# Allegro board 80DB_LIDAR_1.brd
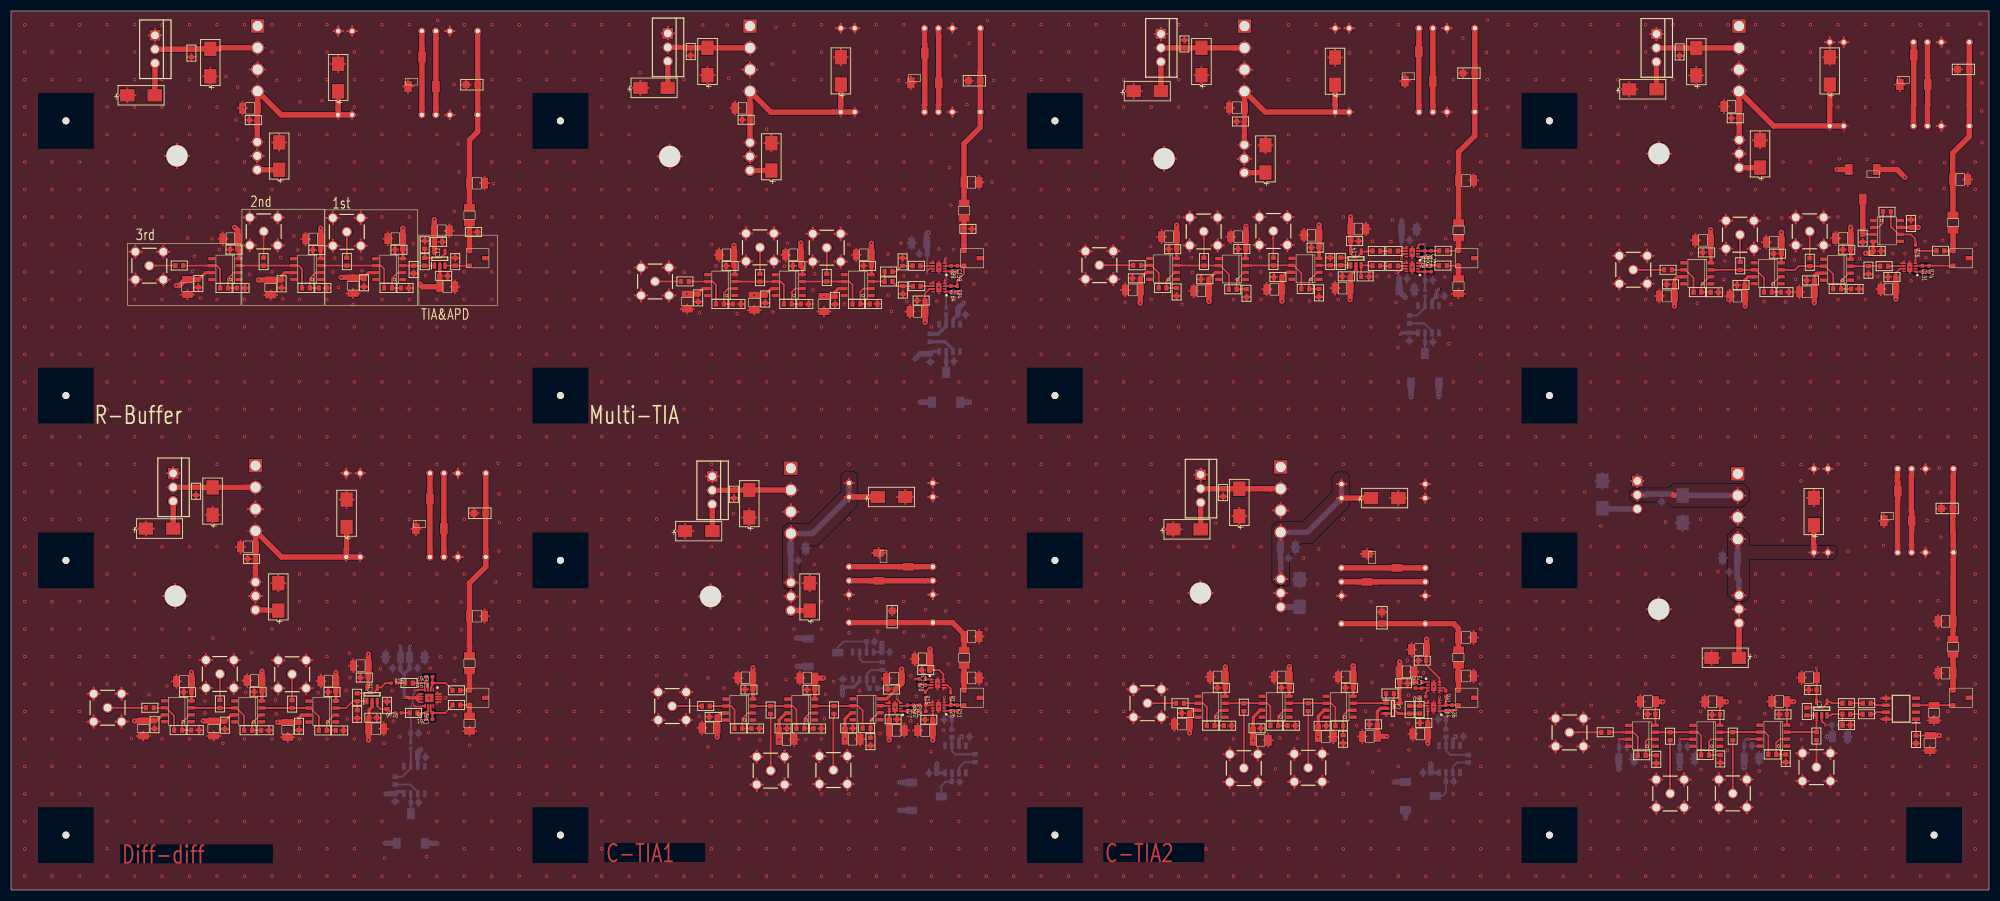
[diagram p0: board, top side]
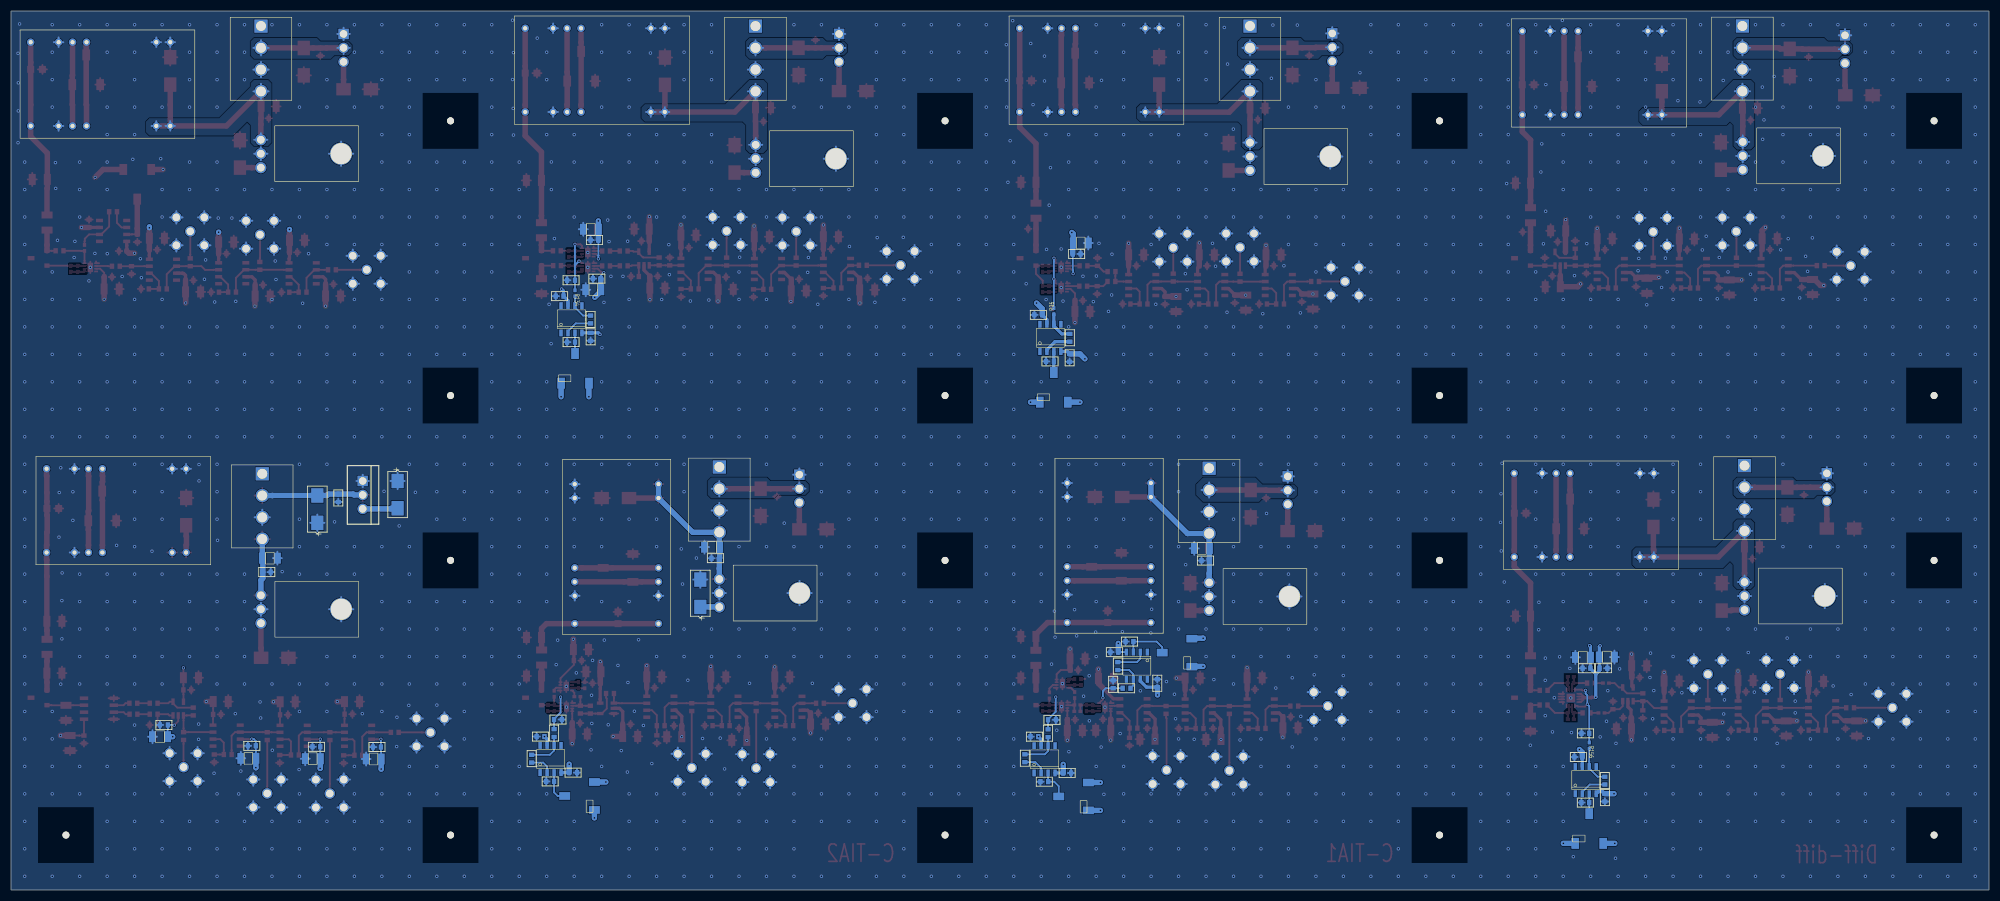
[diagram p1: board, bottom side, seen from below]

Outline 360 x 160 mm; copper layers: TOP, GND, PWD, BOTTOM. Coordinates in mm from the lower left corner of the outline.
Outline path: rectangle 0,0 360,160

## Design rules (mm)
constraint set DEFAULT: min track width 0.127

## Placement (name value [footprint] x y rotation side)
C1  6.8uF_3216  [SMC321612]  143.27 62.18 0 bottom
C2  0.47uF_1608  [SMC1608]  141.9 59.96 0 bottom
C3  10uF_6032  [SMC603212]  145.36 50.86 90 top
C4  47uF_6032  [SMC603212]  157.76 71.54 0 top
C5  4.7nF_2012_250V  [SMC2012]  160.38 48.68 90 top
C6  10uF_6032  [SMC603212]  134.37 67.82 90 top
C7  0.47uF_1608  [SMC1608]  131.56 71.33 90 top
C8  10uF_6032  [SMC603212]  122.68 65.33 0 top
C9  0.1u_1608  [SMC1608]  153.2 29.43 180 top
C10  6.8u_3216  [SMC321612]  153.16 27.45 0 top
C11  0.1u_1608  [SMC1608]  141.23 29.39 180 top
C12  6.8u_3216  [SMC321612]  141.15 27.4 0 top
C13  0.1u_1608  [SMC1608]  127.09 31.52 0 top
C14  6.8u_3216  [SMC321612]  127.14 29.51 180 top
C15  0.1u_1608  [SMC1608]  159.55 36.49 0 top
C16  6.8u_3216  [SMC321612]  160.71 38.51 180 top
C17  0.1u_1608  [SMC1608]  144.89 36.44 0 top
C18  6.8u_3216  [SMC321612]  144.94 38.58 180 top
C19  0.1u_1608  [SMC1608]  133.6 36.5 0 top
C20  6.8u_3216  [SMC321612]  133.66 38.62 180 top
C21  0.1u_1608  [SMC1608]  166.33 31.01 0 top
C22  6.8u_3216  [SMC321612]  166.38 29.03 180 top
C23  0.1u_1608  [SMC1608]  161.26 31.06 180 top
C24  6.8u_3216  [SMC321612]  161.21 29.07 0 top
C25  1n_3216  [SMC321612]  174.84 38.6 180 top
C26  0.2p_1005  [SMR1005]  171.01 33.08 270 top
C27  4p_1005  [SMR1005]  163.12 33.08 270 top
C28  1n_1005  [SMR1005]  165.92 33.68 180 top
C29  1n_3216  [SMC321612]  174.84 46.15 180 top
C30  0.1u_1608  [SMC1608]  151.37 38.35 270 bottom
C31  0.1u_1608  [SMC1608]  174.45 27.92 180 bottom
C32  0.1u_1608  [SMC1608]  159.41 36.73 90 bottom
C33  0.1u_1608  [SMC1608]  171.25 30.98 180 bottom
C34  100n_1005  [SMR1005]  166.43 37.88 90 top
C35  0.1u_1608  [SMC1608]  157.15 45.22 180 bottom
C36  0.1u_1608  [SMC1608]  172.65 19.72 180 bottom
C37  0.1u_1608  [SMC1608]  159.9 43.3 180 bottom
C38  0.1u_1608  [SMC1608]  165.78 40.04 0 top
C39  6.8u_3216  [SMC321612]  165.89 42.08 180 top
C40  0.1u_1608  [SMC1608]  167.07 21.3 0 bottom
C41  6.8uF_3216  [SMC321612]  232.4 62.41 0 bottom
C42  0.47uF_1608  [SMC1608]  231.09 60.39 0 bottom
C43  10uF_6032  [SMC603212]  234.54 51.53 90 bottom
C44  47uF_6032  [SMC603212]  247.52 71.34 0 top
C45  4.7nF_2012_250V  [SMC2012]  249.52 48.48 90 top
C46  10uF_6032  [SMC603212]  223.56 68.07 90 top
C47  0.47uF_1608  [SMC1608]  220.6 71.62 90 top
C48  10uF_6032  [SMC603212]  211.54 65.65 0 top
C49  0.1u_1608  [SMC1608]  239.34 29.89 180 top
C50  6.8u_3216  [SMC321612]  239.29 27.9 0 top
C51  0.1u_1608  [SMC1608]  227.49 29.42 180 top
C52  6.8u_3216  [SMC321612]  227.45 27.24 0 top
C53  0.1u_1608  [SMC1608]  213.08 32.2 0 top
C54  6.8u_3216  [SMC321612]  213.11 30.21 180 top
C55  0.1u_1608  [SMC1608]  242.87 36.82 0 top
C56  6.8u_3216  [SMC321612]  242.92 38.79 180 top
C57  0.1u_1608  [SMC1608]  231.22 36.81 0 top
C58  6.8u_3216  [SMC321612]  231.27 38.78 180 top
C59  0.1u_1608  [SMC1608]  219.56 36.81 0 top
C60  6.8u_3216  [SMC321612]  219.62 38.78 180 top
C61  0.1u_1608  [SMC1608]  256.43 30.4 0 top
C62  6.8u_3216  [SMC321612]  256.49 28.4 180 top
C63  1n_3216  [SMC321612]  264.81 38.95 180 top
C64  0.2p_1005  [SMR1005]  261.12 33.11 270 top
C65  1n_1608  [SMC1608]  256.37 33.55 270 top
C66  1n_3216  [SMC321612]  264.81 45.97 180 top
C67  10u_3216  [SMC321612]  247.31 27.95 180 top
C68  0.1u_1608  [SMC1608]  247.24 30.16 0 top
C69  10u_3216  [SMC321612]  253.99 39.72 0 top
C70  0.1u_1608  [SMC1608]  254.16 37.62 180 top
C71  0.1u_1608  [SMC1608]  264.33 27.93 180 bottom
C72  0.1u_1608  [SMC1608]  261.16 31.03 180 bottom
C73  100n_1005  [SMR1005]  256.73 37.27 90 top
C74  0.1u_1608  [SMC1608]  262.58 19.77 180 bottom
C75  0.1u_1608  [SMC1608]  256.99 21.36 0 bottom
C76  0.1u_1608  [SMC1608]  256.13 41.76 0 top
C77  6.8u_3216  [SMC321612]  256.27 43.77 180 top
C78  6.8uF_3216  [SMC321612]  312.89 60.41 180 bottom
C79  0.47uF_1608  [SMC1608]  314.16 57.87 180 bottom
C80  10uF_6032  [SMC603212]  314.48 42.27 180 top
C81  47uF_6032  [SMC603212]  328.12 66.39 90 top
C82  4.7nF_2012_250V  [SMC2012]  353.46 69.45 180 top
C83  10uF_6032  [SMC603212]  304.25 66.83 90 bottom
C84  0.47uF_1608  [SMC1608]  300.44 70.64 90 bottom
C85  10uF_6032  [SMC603212]  289.64 74.45 270 bottom
C86  0.1u_1608  [SMC1608]  316.88 26.25 180 bottom
C87  6.8u_3216  [SMC321612]  316.8 23.98 0 bottom
C88  0.1u_1608  [SMC1608]  305.12 26.08 180 bottom
C89  6.8u_3216  [SMC321612]  305.07 23.9 0 bottom
C90  0.1u_1608  [SMC1608]  294.1 26.02 180 bottom
C91  6.8u_3216  [SMC321612]  294 23.85 0 bottom
C92  0.1u_1608  [SMC1608]  321.79 31.96 0 top
C93  6.8u_3216  [SMC321612]  321.83 34.3 180 top
C94  0.1u_1608  [SMC1608]  309.6 31.89 0 top
C95  6.8u_3216  [SMC321612]  309.64 34.26 180 top
C96  0.1u_1608  [SMC1608]  297.86 32 0 top
C97  6.8u_3216  [SMC321612]  297.93 34.29 180 top
C98  100n_1608  [SMC1608]  327.2 36.42 0 top
C99  10u_3216  [SMC321612]  327.25 38.64 180 top
C100  100n_1608  [SMC1608]  332.88 30.05 180 bottom
C101  10u_3216  [SMC321612]  332.87 27.9 0 bottom
C102  10n_1608  [SMC1608]  346.72 26.69 90 top
C103  6.8u_3216  [SMC321612]  349.25 26.75 270 top
C104  1n_3216  [SMC321612]  352.1 39.48 0 top
C105  0.1u_1608  [SMC1608]  337 32 0 top
C106  0.1u_1608  [SMC1608]  338.45 34 180 top
C107  1n_3216  [SMC321612]  352.1 48.91 0 top
C108  6.8uF_3216  [SMC321612]  313.12 142.63 180 top
C109  0.47uF_1608  [SMC1608]  314.52 140.47 180 top
C110  10uF_6032  [SMC603212]  318.33 131.49 90 top
C111  47uF_6032  [SMC603212]  331.02 146.6 90 top
C112  4.7nF_2012_250V  [SMC2012]  356.41 149.37 180 top
C113  10uF_6032  [SMC603212]  306.71 148.28 90 top
C114  0.47uF_1608  [SMC1608]  303.69 151.84 90 top
C115  10uF_6032  [SMC603212]  294.5 145.75 0 top
C116  0.1u_1608  [SMC1608]  326.81 110.97 0 top
C117  6.8u_3216  [SMC321612]  326.86 108.87 180 top
C118  0.1u_1608  [SMC1608]  314.14 110.13 0 top
C119  6.8u_3216  [SMC321612]  314.19 108.1 180 top
C120  0.1u_1608  [SMC1608]  301.31 110.25 0 top
C121  6.8u_3216  [SMC321612]  301.38 108.12 180 top
C122  0.1u_1608  [SMC1608]  333.39 116.55 0 top
C123  6.8u_3216  [SMC321612]  333.44 118.64 180 top
C124  0.1u_1608  [SMC1608]  320.79 115.83 0 top
C125  6.8u_3216  [SMC321612]  320.83 117.93 180 top
C126  0.1u_1608  [SMC1608]  307.89 116.06 0 top
C127  6.8u_3216  [SMC321612]  307.94 118.27 180 top
C128  1n_3216  [SMC321612]  354.76 129.34 180 top
C129  0.1u_1608  [SMC1608]  341.62 111.58 0 top
C130  6.8u_3216  [SMC321612]  341.68 109.39 180 top
C131  4p_1005  [SMR1005]  347.86 113.09 270 top
C132  1n_1608  [SMC1608]  351.87 116.35 180 top
C133  1n_1608  [SMC1608]  341.62 113.54 180 top
C134  0.1u_1608  [SMC1608]  345.79 122.03 270 top
C135  0.1u_1608  [SMC1608]  337 117.93 90 top
C136  0.1u_1608  [SMC1608]  340.35 116.31 180 top
C137  6.8uF_3216  [SMC321612]  133.13 142.32 180 top
C138  0.47uF_1608  [SMC1608]  134.5 140.2 180 top
C139  10uF_6032  [SMC603212]  138.39 130.97 90 top
C140  47uF_6032  [SMC603212]  151.04 146.61 90 top
C141  4.7nF_2012_250V  [SMC2012]  176.4 147.3 180 top
C142  10uF_6032  [SMC603212]  126.77 148.32 90 top
C143  0.47uF_1608  [SMC1608]  123.71 151.89 90 top
C144  10uF_6032  [SMC603212]  114.55 146.01 0 top
C145  0.1u_1608  [SMC1608]  149.97 106.61 90 top
C146  6.8u_3216  [SMC321612]  147.97 106.67 270 top
C147  0.1u_1608  [SMC1608]  137.26 106.86 90 top
C148  6.8u_3216  [SMC321612]  135.26 106.92 270 top
C149  0.1u_1608  [SMC1608]  125.06 107.06 90 top
C150  6.8u_3216  [SMC321612]  123.06 107.11 270 top
C151  0.1u_1608  [SMC1608]  155.16 113.61 0 top
C152  6.8u_3216  [SMC321612]  155.22 115.61 180 top
C153  0.1u_1608  [SMC1608]  142.31 113.61 0 top
C154  6.8u_3216  [SMC321612]  142.37 115.61 180 top
C155  0.1u_1608  [SMC1608]  130.16 113.61 0 top
C156  6.8u_3216  [SMC321612]  130.22 115.61 180 top
C157  0.1u_1608  [SMC1608]  165.33 115.78 0 bottom
C158  6.8u_3216  [SMC321612]  165.3 117.77 180 bottom
C159  4p_1005  [SMR1005]  172.25 113.1 270 top
C160  1n_1608  [SMC1608]  165.51 113.61 180 top
C161  1n_3216  [SMC321612]  174.82 128.82 180 top
C162  0.1u_1608  [SMC1608]  164.93 107.3 0 top
C163  6.8u_3216  [SMC321612]  164.99 105.31 180 top
C164  4p_1005  [SMR1005]  171.08 109.38 270 top
C165  1n_1608  [SMC1608]  173.45 120.35 0 top
C166  1n_1608  [SMC1608]  165.56 109.92 180 top
C167  0.1u_1608  [SMC1608]  173.74 104.7 180 bottom
C168  0.1u_1608  [SMC1608]  171.61 96.22 180 bottom
C169  0.1u_1608  [SMC1608]  167.33 96.16 90 bottom
C170  6.8uF_3216  [SMC321612]  43.51 142.3 180 top
C171  0.47uF_1608  [SMC1608]  44.81 140.13 180 top
C172  10uF_6032  [SMC603212]  48.81 131.1 90 top
C173  47uF_6032  [SMC603212]  59.54 145.39 90 top
C174  4.7nF_2012_250V  [SMC2012]  84.95 146.57 180 top
C175  10uF_6032  [SMC603212]  36.27 148.12 90 top
C176  0.47uF_1608  [SMC1608]  32.83 151.62 90 top
C177  10uF_6032  [SMC603212]  21.18 144.66 0 top
C178  0.1u_1608  [SMC1608]  64.25 109.81 90 top
C179  6.8u_3216  [SMC321612]  62.27 109.97 270 top
C180  0.1u_1608  [SMC1608]  49.24 109.62 90 top
C181  6.8u_3216  [SMC321612]  47.27 109.67 270 top
C182  0.1u_1608  [SMC1608]  34.09 109.7 90 top
C183  6.8u_3216  [SMC321612]  32.12 109.75 270 top
C184  0.1u_1608  [SMC1608]  69.89 116.55 0 top
C185  6.8u_3216  [SMC321612]  69.94 118.55 180 top
C186  0.1u_1608  [SMC1608]  54.94 116.5 0 top
C187  6.8u_3216  [SMC321612]  55 118.5 180 top
C188  0.1u_1608  [SMC1608]  39.87 116.58 0 top
C189  6.8u_3216  [SMC321612]  39.92 118.55 180 top
C190  0.1u_1608  [SMC1608]  78.51 117.98 180 top
C191  6.8u_3216  [SMC321612]  78.41 119.99 0 top
C192  1n_3216  [SMC321612]  84.81 128.67 180 top
C193  1n_1608  [SMC1608]  83.45 119.78 0 top
C194  0.1u_1608  [SMC1608]  79.46 111.79 180 top
C195  6.8u_3216  [SMC321612]  79.4 109.81 0 top
C196  6.8uF_3216  [SMC321612]  223.13 142.39 180 top
C197  0.47uF_1608  [SMC1608]  224.48 139.88 180 top
C198  10uF_6032  [SMC603212]  228.31 130.59 90 top
C199  47uF_6032  [SMC603212]  240.98 146.55 90 top
C200  4.7nF_2012_250V  [SMC2012]  266.41 148.69 180 top
C201  10uF_6032  [SMC603212]  216.66 148.32 90 top
C202  0.47uF_1608  [SMC1608]  213.58 154.71 270 top
C203  10uF_6032  [SMC603212]  204.32 145.42 0 top
C204  0.1u_1608  [SMC1608]  229.87 111.57 0 top
C205  6.8u_3216  [SMC321612]  229.92 109.34 180 top
C206  0.1u_1608  [SMC1608]  216.57 111.17 0 top
C207  6.8u_3216  [SMC321612]  216.63 109.06 180 top
C208  0.1u_1608  [SMC1608]  204.11 111.34 0 top
C209  6.8u_3216  [SMC321612]  204.17 109.23 180 top
C210  0.1u_1608  [SMC1608]  236.65 116.94 0 top
C211  6.8u_3216  [SMC321612]  236.69 119.19 180 top
C212  0.1u_1608  [SMC1608]  223.3 116.69 0 top
C213  6.8u_3216  [SMC321612]  223.35 118.91 180 top
C214  0.1u_1608  [SMC1608]  210.72 116.66 0 top
C215  6.8u_3216  [SMC321612]  210.78 118.91 180 top
C216  1n_3216  [SMC321612]  264.83 129.16 180 top
C217  0.1u_1608  [SMC1608]  254.51 118.3 180 bottom
C218  6.8u_3216  [SMC321612]  254.47 120.28 0 bottom
C219  0.1u_1608  [SMC1608]  245.26 118.12 180 top
C220  6.8u_3216  [SMC321612]  245.22 120.31 0 top
C221  4p_1005  [SMR1005]  258.48 115.8 270 top
C222  1n_1608  [SMC1608]  261.36 116.35 180 top
C223  1n_1608  [SMC1608]  252.41 116.31 180 top
C224  0.1u_1608  [SMC1608]  254.08 111.28 180 bottom
C225  6.8u_3216  [SMC321612]  254.02 109.26 0 bottom
C226  4p_1005  [SMR1005]  258.47 113.1 90 top
C227  1n_1608  [SMC1608]  261.32 113.65 180 top
C228  1n_1608  [SMC1608]  252.41 113.6 180 top
C229  1n_1608  [SMC1608]  258.78 110.99 180 bottom
C230  0.1u_1608  [SMC1608]  242.31 111.7 0 top
C231  6.8u_3216  [SMC321612]  242.36 109.56 180 top
C232  0.1u_1608  [SMC1608]  260.86 108.1 180 bottom
C233  0.1u_1608  [SMC1608]  258.78 99.73 180 bottom
C234  0.1u_1608  [SMC1608]  254.51 99.98 90 bottom
C235  6.8uF_3216  [SMC321612]  43.15 62.46 180 top
C236  0.47uF_1608  [SMC1608]  44.49 60.27 180 top
C237  10uF_6032  [SMC603212]  48.65 50.86 90 top
C238  47uF_6032  [SMC603212]  61.08 66.09 90 top
C239  4.7nF_2012_250V  [SMC2012]  86.4 68.59 180 top
C240  10uF_6032  [SMC603212]  36.69 68.3 90 top
C241  0.47uF_1608  [SMC1608]  33.67 71.88 90 top
C242  10uF_6032  [SMC603212]  24.54 65.79 0 top
C243  0.1u_1608  [SMC1608]  52.41 29.1 90 top
C244  6.8u_3216  [SMC321612]  50.37 29.16 270 top
C245  0.1u_1608  [SMC1608]  38.91 29.28 90 top
C246  6.8u_3216  [SMC321612]  36.9 29.41 270 top
C247  0.1u_1608  [SMC1608]  26.12 29.37 90 top
C248  6.8u_3216  [SMC321612]  24.08 29.41 270 top
C249  0.1u_1608  [SMC1608]  57.71 36.04 0 top
C250  6.8u_3216  [SMC321612]  57.77 38.03 180 top
C251  0.1u_1608  [SMC1608]  44.25 36.09 0 top
C252  6.8u_3216  [SMC321612]  44.32 38.13 180 top
C253  0.1u_1608  [SMC1608]  31.43 36.01 0 top
C254  6.8u_3216  [SMC321612]  31.48 37.97 180 top
C255  6.8u_3216  [SMC321612]  69.55 42.4 180 bottom
C256  6.8u_3216  [SMC321612]  73.91 42.35 0 bottom
C257  0.1u_1608  [SMC1608]  69.46 40.36 0 bottom
C258  0.1u_1608  [SMC1608]  63.58 38.68 0 top
C259  6.8u_3216  [SMC321612]  63.67 40.82 180 top
C260  0.1u_1608  [SMC1608]  73.97 40.37 180 bottom
C261  4p_1005  [SMR1005]  76.15 31.08 180 top
C262  1n_3216  [SMC321612]  84.81 49.85 180 top
C263  1n_1608  [SMC1608]  73.97 32.24 180 top
C264  1n_1608  [SMC1608]  81.78 33.67 180 top
C265  1n_1608  [SMC1608]  81.77 36.34 180 top
C266  1n_1608  [SMC1608]  73.15 37.66 180 top
C267  4p_1005  [SMR1005]  76.16 38.84 180 top
C268  0.1u_1608  [SMC1608]  66.58 31.36 180 top
C269  6.8u_3216  [SMC321612]  66.45 29.34 0 top
C270  1n_1608  [SMC1608]  74.17 28.52 180 bottom
C271  0.1u_1608  [SMC1608]  75.45 24.22 180 bottom
C272  0.1u_1608  [SMC1608]  74.19 15.91 180 bottom
C273  0.1u_1608  [SMC1608]  69.92 16.11 90 bottom
IC1  OPA855IDSGR  [SON50P200X200X80-9N]  168.8 33.38 180 top
IC2  OPA855IDSGR  [SON50P200X200X80-9N]  160.9 33.28 180 top
IC3  OPA855IDSGR  [SON50P200X200X80-9N]  168.64 37.57 0 top
IC4  OPA855IDSGR  [SON50P200X200X80-9N]  258.91 33.3 180 top
IC5  OPA659IDBVT  [SOT95P280X145-5N]  251.52 33.07 0 top
IC6  OPA855IDSGR  [SON50P200X200X80-9N]  258.94 37.07 0 top
IC7  OPA659IDBVT  [SOT95P280X145-5N]  329.56 33.02 90 top
IC8  MAX3267CSA+  [SOIC127P600X175-8N]  344 33 180 top
IC9  OPA855IDSGR  [SON50P200X200X80-9N]  345.56 113.34 180 top
IC10  OPA855IDSGR  [SON50P200X200X80-9N]  168.87 113.36 180 top
IC11  OPA855IDSGR  [SON50P200X200X80-9N]  168.87 109.67 180 top
IC12  OPA659IDBVT  [SOT95P280X145-5N]  78.04 114.9 90 top
IC13  OPA855IDSGR  [SON50P200X200X80-9N]  255.02 116.05 180 top
IC14  OPA659IDBVT  [SOT95P280X145-5N]  244.79 114.95 90 top
IC15  OPA855IDSGR  [SON50P200X200X80-9N]  255.02 113.35 180 top
IC16  OPA659IDBVT  [SOT95P280X145-5N]  65.72 35.62 90 top
IC17  THS4509RGTT  [THS4509RGTT_PIN16_TEST_2_THS4509RGTT]  76.12 34.96 270 top
JP1  4 HEADER  [HEADER4]  141.94 70.83 180 bottom
JP2  4 HEADER  [HEADER4]  231.08 71.06 180 bottom
JP3  4 HEADER  [HEADER4]  314.27 69.82 180 bottom
JP4  4 HEADER  [HEADER4]  314.5 151.31 180 bottom
JP5  4 HEADER  [HEADER4]  134.5 151.31 180 bottom
JP6  4 HEADER  [HEADER4]  44.88 151.33 180 bottom
JP7  4 HEADER  [HEADER4]  224.5 151.31 180 bottom
JP8  4 HEADER  [HEADER4]  44.5 71.31 180 bottom
NOREF  -  [unnamed]  280 140 0 top
NOREF#2  -  [unnamed]  10 60 0 top
NOREF#3  -  [unnamed]  10 10 0 top
NOREF#4  -  [unnamed]  350 10 0 top
NOREF#5  -  [unnamed]  100 90 0 top
NOREF#6  -  [unnamed]  190 10 0 top
NOREF#7  -  [unnamed]  190 140 0 top
NOREF#8  -  [unnamed]  10 140 0 top
NOREF#9  -  [unnamed]  100 140 0 top
NOREF#10  -  [unnamed]  190 90 0 top
NOREF#11  -  [unnamed]  280 90 0 top
NOREF#12  -  [unnamed]  280 60 0 top
NOREF#13  -  [unnamed]  190 60 0 top
NOREF#14  -  [unnamed]  10 90 0 top
NOREF#15  -  [unnamed]  100 60 0 top
NOREF#16  -  [unnamed]  280 10 0 top
NOREF#17  -  [unnamed]  100 10 0 top
R1  5 kohm  [ST5EW]  157.92 61.37 0 top
R2  390_1608  [SMR1608]  155 29.46 0 top
R3  390_1608  [SMR1608]  142.96 29.4 0 top
R4  390_1608  [SMR1608]  131.68 29.41 0 top
R5  36_1608  [SMR1608]  156.43 27.71 270 top
R6  36_1608  [SMR1608]  146.06 29.4 0 top
R7  36_1608  [SMR1608]  134.77 29.41 0 top
R8  50_1608  [SMR1608]  149.78 33.49 270 top
R9  50_1608  [SMR1608]  138.25 33.48 270 top
R10  50_1608  [SMR1608]  127.16 33.48 180 top
R11  5M_1005  [SMR1005]  172.25 33.08 270 top
R12  1k_1005  [SMR1005]  164.27 33.08 270 top
R13  20k_3216  [SMR3216]  173.47 42.26 270 top
R14  200_1005  [SMR1005]  165.93 32.52 180 top
R16  80k_1005  [SMR1005]  166.41 35.49 270 top
R17  5M_1005  [SMR1005]  171.01 35.42 270 top
R18  200_1608  [SMR1608]  158.56 40.05 90 bottom
R19  200_1608  [SMR1608]  175.47 24.7 270 bottom
R20  80k_1005  [SMR1005]  165.27 37.88 270 top
R21  20 kohm  [ST5EW]  145.08 40.67 0 bottom
R22  10_1608  [SMC1608]  157.67 36.73 180 bottom
R23  20 kohm  [ST5EW]  163.91 14.49 0 bottom
R24  10_1608  [SMC1608]  171.25 29.25 270 bottom
R25  5 kohm  [ST5EW]  246.82 61.17 0 top
R26  390_1608  [SMR1608]  241.04 29.91 0 top
R27  390_1608  [SMR1608]  229.21 29.92 0 top
R28  390_1608  [SMR1608]  217.64 29.92 0 top
R29  36_1608  [SMR1608]  242.45 28.16 270 top
R30  36_1608  [SMR1608]  232.31 29.92 0 top
R31  36_1608  [SMR1608]  220.72 29.92 0 top
R32  50_1608  [SMR1608]  236.1 34 270 top
R33  50_1608  [SMR1608]  224.38 33.99 270 top
R34  50_1608  [SMR1608]  213.47 33.99 180 top
R35  200_1608  [SMC1608]  251.69 35.77 180 top
R36  5M_1005  [SMR1005]  262.29 33.11 270 top
R37  20k_3216  [SMR3216]  263.43 42.32 270 top
R38  200_1608  [SMR1608]  254.56 33.54 270 top
R40  80k_1005  [SMR1005]  256.92 35.19 180 top
R41  5M_1005  [SMR1005]  261.14 35.72 270 top
R42  200_1608  [SMR1608]  265.24 24.62 270 bottom
R43  20 kohm  [ST5EW]  253.82 14.58 0 bottom
R44  10_1608  [SMC1608]  261.16 29.28 270 bottom
R45  80k_1005  [SMR1005]  255.57 37.27 90 top
R46  5 kohm  [ST5EW]  340.86 67.22 90 top
R47  390_1608  [SMR1608]  319.85 24.67 0 top
R48  390_1608  [SMR1608]  307.62 24.58 0 top
R49  390_1608  [SMR1608]  296.07 24.53 0 top
R50  36_1608  [SMR1608]  323.01 24.66 270 top
R51  36_1608  [SMR1608]  311.09 24.57 270 top
R52  36_1608  [SMR1608]  299.45 24.51 270 top
R53  50_1608  [SMR1608]  313.36 28.72 270 top
R54  50_1608  [SMR1608]  301.96 28.71 270 top
R55  50_1608  [SMR1608]  290.86 28.7 180 top
R56  50_1608  [SMR1608]  328.59 28.74 270 top
R57  249_1608  [SMC1608]  326.83 31.78 90 top
R58  249_1608  [SMC1608]  334.75 32 180 top
R59  20k_3216  [SMR3216]  353.44 44.26 270 top
R60  249_1608  [SMC1608]  334.75 34 180 top
R61  249_1608  [SMC1608]  333.35 30.03 0 top
R62  NC_3216  [SMR3216]  350 32.25 270 top
R63  5 kohm  [ST5EW]  343.77 146.6 90 top
R64  390_1608  [SMR1608]  331.65 109.41 0 top
R65  390_1608  [SMR1608]  319.06 108.83 0 top
R66  390_1608  [SMR1608]  306.21 108.82 0 top
R67  36_1608  [SMR1608]  334.9 109.41 0 top
R68  36_1608  [SMR1608]  322.14 108.82 0 top
R69  36_1608  [SMR1608]  309.35 108.8 0 top
R70  50_1608  [SMR1608]  327.38 113.55 90 top
R71  50_1608  [SMR1608]  314.71 112.9 90 top
R72  50_1608  [SMR1608]  302.3 112.89 180 top
R73  20k_3216  [SMR3216]  353.44 121.49 270 top
R74  1k_1005  [SMR1005]  349.12 113.09 270 top
R75  200_1608  [SMR1608]  338.06 113.54 270 top
R76  1k_1005  [SMR1005]  346.62 116.87 270 top
R77  200_1608  [SMR1608]  342.13 123.46 180 top
R78  20 kohm  [ST5EW]  339.56 131.15 270 top
R79  5 kohm  [ST5EW]  163.78 146.92 90 top
R80  390_1608  [SMR1608]  153.16 106.67 0 top
R81  390_1608  [SMR1608]  140.66 106.67 0 top
R82  390_1608  [SMR1608]  128.31 106.67 0 top
R83  36_1608  [SMR1608]  156.26 106.67 0 top
R84  36_1608  [SMR1608]  143.76 106.67 0 top
R85  36_1608  [SMR1608]  131.41 106.67 0 top
R86  50_1608  [SMR1608]  148.47 110.77 90 top
R87  50_1608  [SMR1608]  136.31 110.75 90 top
R88  50_1608  [SMR1608]  123.37 110.77 180 top
R89  1k_1005  [SMR1005]  171.1 113.08 270 top
R90  200_1608  [SMR1608]  162.26 113.61 90 top
R91  0_1608  [SMR1608]  160.41 112.56 180 top
R92  20k_3216  [SMR3216]  173.45 123.65 270 top
R93  0_1608  [SMR1608]  159.01 110.77 0 top
R94  1k_1005  [SMR1005]  172.23 109.38 270 top
R95  200_1608  [SMR1608]  162.31 109.92 270 top
R96  1k_1005  [SMR1005]  170.2 105.36 90 bottom
R97  200_1608  [SMR1608]  167.28 101.23 270 bottom
R98  20 kohm  [ST5EW]  172.75 88.8 90 bottom
R99  5 kohm  [ST5EW]  72.26 146.26 90 top
R100  390_1608  [SMR1608]  67.92 109.58 0 top
R101  390_1608  [SMR1608]  52.97 109.58 0 top
R102  390_1608  [SMR1608]  38.06 109.58 0 top
R103  36_1608  [SMR1608]  71 109.58 0 top
R104  36_1608  [SMR1608]  56.05 109.58 0 top
R105  36_1608  [SMR1608]  41.15 109.58 0 top
R106  50_1608  [SMR1608]  61.12 113.66 90 top
R107  50_1608  [SMR1608]  45.97 113.66 90 top
R108  50_1608  [SMR1608]  31.33 113.66 180 top
R109  200_1608  [SMR1608]  75.3 113.65 90 top
R110  200_1608  [SMR1608]  75.3 116.73 90 top
R111  20k_3216  [SMR3216]  83.45 122.82 270 top
R112  10_1608  [SMR1608]  80.84 113.65 90 top
R113  5 kohm  [ST5EW]  253.69 147.24 90 top
R114  390_1608  [SMR1608]  234.84 109.42 0 top
R115  390_1608  [SMR1608]  221.65 109.34 0 top
R116  390_1608  [SMR1608]  208.88 109.58 0 top
R117  36_1608  [SMR1608]  238.05 109.4 270 top
R118  36_1608  [SMR1608]  224.86 109.34 270 top
R119  36_1608  [SMR1608]  212.15 109.57 270 top
R120  50_1608  [SMR1608]  229.76 113.68 90 top
R121  50_1608  [SMR1608]  217.1 113.67 90 top
R122  50_1608  [SMR1608]  205.67 113.71 180 top
R123  20k_3216  [SMR3216]  263.46 120.09 270 top
R124  1k_1005  [SMR1005]  257.32 115.8 270 top
R125  70_1608  [SMR1608]  249.2 116.31 180 top
R126  130_1608  [SMR1608]  242.03 115.13 270 top
R127  100_1608  [SMR1608]  240.11 113.7 90 top
R128  1k_1005  [SMR1005]  257.31 113.1 90 top
R129  20k_3216  [SMR3216]  263.44 109.91 90 top
R130  70_1608  [SMR1608]  247.77 113.61 0 top
R131  130_1608  [SMR1608]  247.16 111.68 180 top
R132  200_1608  [SMR1608]  254.51 104.56 270 bottom
R133  20 kohm  [ST5EW]  259.88 92.26 90 bottom
R134  1k_1005  [SMR1005]  257.35 108.61 270 bottom
R135  5 kohm  [ST5EW]  73.7 65.76 90 top
R136  390_1608  [SMR1608]  56.03 29.05 0 top
R137  390_1608  [SMR1608]  42.44 29.08 0 top
R138  390_1608  [SMR1608]  29.71 29.1 0 top
R139  36_1608  [SMR1608]  59.11 29.05 0 top
R140  36_1608  [SMR1608]  45.53 29.08 0 top
R141  36_1608  [SMR1608]  32.81 29.1 0 top
R142  50_1608  [SMR1608]  51.17 33.13 90 top
R143  50_1608  [SMR1608]  38.01 33.16 90 top
R144  50_1608  [SMR1608]  25.99 33.17 180 top
R145  1k_1005  [SMR1005]  76.15 32.24 180 top
R146  70_1608  [SMR1005]  70.53 32.24 180 top
R147  130_1608  [SMR1608]  63 35.8 270 top
R148  20k_3216  [SMR3216]  83.45 41.27 270 top
R149  100_1608  [SMR1608]  63.01 32.7 270 top
R150  20k_3216  [SMR3216]  83.46 30.28 270 top
R151  1k_1005  [SMR1005]  76.16 37.67 180 top
R152  70_1608  [SMR1005]  69.72 37.66 0 top
R153  130_1608  [SMR1608]  68.45 34.33 270 top
R154  200_1608  [SMR1608]  69.92 20.62 270 bottom
R155  20 kohm  [ST5EW]  75.31 8.5 90 bottom
R156  1k_1005  [SMR1005]  72.75 26.3 270 bottom
R157  200_1608  [SMR1608]  73.28 113.65 270 top
U1  LM2940  [LM2940_TO220]  141.94 55.97 270 bottom
U2  R12_150B  [R12_150]  160.15 62.65 180 bottom
U3  LM2990  [LM2990_TO220AB]  127.63 75.29 270 top
U4  OPA695  [SOIC8]  155.71 32.9 180 top
U5  OPA695  [SOIC8]  143.83 32.85 180 top
U6  OPA695  [SOIC8]  132.56 32.85 180 top
U7  SMA_CON  [RFSMAV]  149.68 21.83 0 top
U8  SMA_CON  [RFSMAV]  138.26 21.73 0 top
U9  SMA_CON  [RFSMAV]  120.34 33.48 0 top
U10  mtapd_07_013  [LCC3_SMD]  176.35 35 270 top
U11  -  [OPA277]  155.09 40.83 270 bottom
U12  -  [OPA277]  171.88 23.78 90 bottom
U13  LM2940  [LM2940_TO220]  231.09 56.59 270 bottom
U14  R12_150B  [R12_150]  249.77 62.45 180 bottom
U15  LM2990  [LM2990_TO220AB]  216.52 75.6 270 top
U16  OPA695  [SOIC8]  241.81 33.36 180 top
U17  OPA695  [SOIC8]  230.16 33.36 180 top
U18  OPA695  [SOIC8]  218.51 33.35 180 top
U19  SMA_CON  [RFSMAV]  236.1 22.25 0 top
U20  SMA_CON  [RFSMAV]  224.38 22.18 0 top
U21  SMA_CON  [RFSMAV]  206.84 34 0 top
U22  mtapd_07_013  [LCC3_SMD]  266.35 35 270 top
U23  -  [OPA277]  261.79 23.84 90 bottom
U24  LM2940  [LM2940_TO220]  314.51 53.65 270 bottom
U25  R12_150B  [R12_150]  339.56 69.06 270 bottom
U26  LM2990  [LM2990_TO220AB]  295.99 74.45 270 bottom
U27  OPA695  [SOIC8]  320.75 28.1 180 top
U28  OPA695  [SOIC8]  308.56 28.07 180 top
U29  OPA695  [SOIC8]  296.83 28.07 180 top
U30  SMA_CON  [RFSMAV]  313.37 17.58 0 top
U31  SMA_CON  [RFSMAV]  301.98 17.56 0 top
U32  SMA_CON  [RFSMAV]  283.65 28.68 0 top
U33  SMA_CON  [RFSMAV]  328.59 22.36 0 top
U34  mtapd_07_013  [LCC3_SMD]  356.35 35 270 top
U35  LM2940  [LM2940_TO220]  314.53 136.56 270 bottom
U36  R12_150B  [R12_150]  342.44 146.69 270 bottom
U37  LM2990  [LM2990_TO220AB]  299.47 155.82 270 top
U38  OPA695  [SOIC8]  332.35 112.91 180 top
U39  OPA695  [SOIC8]  319.74 112.26 180 top
U40  OPA695  [SOIC8]  306.92 112.25 180 top
U41  SMA_CON  [RFSMAV]  327.37 119.89 0 top
U42  SMA_CON  [RFSMAV]  314.68 119.28 0 top
U43  SMA_CON  [RFSMAV]  295.25 112.9 0 top
U44  mtapd_07_013  [LCC3_SMD]  356.35 115 270 top
U45  -  [OPA277]  341.42 119.97 0 top
U46  LM2940  [LM2940_TO220]  134.5 136.05 270 bottom
U47  R12_150B  [R12_150]  162.44 149.24 270 bottom
U48  LM2990  [LM2990_TO220AB]  119.53 155.92 270 top
U49  OPA695  [SOIC8]  154.12 110.11 180 top
U50  OPA695  [SOIC8]  141.56 110.11 180 top
U51  OPA695  [SOIC8]  129.26 110.11 180 top
U52  SMA_CON  [RFSMAV]  148.47 116.92 0 top
U53  SMA_CON  [RFSMAV]  136.31 116.97 0 top
U54  SMA_CON  [RFSMAV]  117.22 110.77 0 top
U55  mtapd_07_013  [LCC3_SMD]  176.35 115 270 top
U56  -  [OPA277]  170.83 100.5 90 bottom
U57  LM2940  [LM2940_TO220]  44.82 136.17 270 bottom
U58  R12_150B  [R12_150]  70.97 148.72 270 bottom
U59  LM2990  [LM2990_TO220AB]  26.21 155.57 270 top
U60  OPA695  [SOIC8]  68.84 113.03 180 top
U61  OPA695  [SOIC8]  53.9 113.03 180 top
U62  OPA695  [SOIC8]  39.01 113.02 180 top
U63  SMA_CON  [RFSMAV]  61.12 119.8 0 top
U64  SMA_CON  [RFSMAV]  45.99 119.88 0 top
U65  SMA_CON  [RFSMAV]  25.18 113.64 0 top
U66  mtapd_07_013  [LCC3_SMD]  86.35 115 270 top
U67  LM2940  [LM2940_TO220]  224.47 135.65 270 bottom
U68  R12_150B  [R12_150]  252.44 149.24 270 bottom
U69  LM2990  [LM2990_TO220AB]  209.29 155.83 270 top
U70  OPA695  [SOIC8]  235.59 113.06 180 top
U71  OPA695  [SOIC8]  222.22 113.03 180 top
U72  OPA695  [SOIC8]  209.68 113.06 180 top
U73  SMA_CON  [RFSMAV]  229.75 119.95 0 top
U74  SMA_CON  [RFSMAV]  217.07 119.87 0 top
U75  SMA_CON  [RFSMAV]  198.09 113.73 0 top
U76  mtapd_07_013  [LCC3_SMD]  266.35 115 270 top
U77  -  [OPA277]  257.99 103.88 90 bottom
U78  LM2940  [LM2940_TO220]  44.5 56.05 270 bottom
U79  R12_150B  [R12_150]  72.44 68.23 270 bottom
U80  LM2990  [LM2990_TO220AB]  29.52 75.84 270 top
U81  OPA695  [SOIC8]  56.66 32.48 180 top
U82  OPA695  [SOIC8]  43.18 32.51 180 top
U83  OPA695  [SOIC8]  30.39 32.54 180 top
U84  SMA_CON  [RFSMAV]  51.17 39.27 0 top
U85  SMA_CON  [RFSMAV]  38.01 39.32 0 top
U86  SMA_CON  [RFSMAV]  17.58 33.18 0 top
U87  mtapd_07_013  [LCC3_SMD]  86.35 35 270 top
U88  -  [OPA277]  73.39 20 90 bottom

## Library data of the parts
C1 C10 C12 C14 C16 C18 C20 C22 C24-C29 C34 C39 C41 C50 C52 C54 C56 C58 C60 C62-C67 C69 C73 C77 C78 C87 C89 C91 C93 C95 C97 C99 C101 C103-C108 C117 C119 C121 C123 C125 C127 C128 C130-C133 C137 C146 C148 C150 C152 C154 C156 C158-C161 C163-C166 C170 C179 C181 C183 C185 C187 C189 C191-C193 C195 C196 C205 C207 C209 C211 C213 C215 C216 C218 C220-C223 C225-C229 C231 C235 C244 C246 C248 C250 C252 C254-C256 C259 C261-C267 C269 C270 = CAP_3216
C2 C7 C9 C11 C13 C15 C17 C19 C21 C23 C30-C33 C35-C38 C40 C42 C47 C49 C51 C53 C55 C57 C59 C61 C68 C70-C72 C74-C76 C79 C84 C86 C88 C90 C92 C94 C96 C98 C100 C102 C109 C114 C116 C118 C120 C122 C124 C126 C129 C134-C136 C138 C143 C145 C147 C149 C151 C153 C155 C157 C162 C167-C169 C171 C176 C178 C180 C182 C184 C186 C188 C190 C194 C197 C202 C204 C206 C208 C210 C212 C214 C217 C219 C224 C230 C232-C234 C236 C241 C243 C245 C247 C249 C251 C253 C257 C258 C260 C268 C271-C273 = CAP_1608
C3 C4 C6 C8 C43 C44 C46 C48 C80 C81 C83 C85 C110 C111 C113 C115 C139 C140 C142 C144 C172 C173 C175 C177 C198 C199 C201 C203 C237 C238 C240 C242 = CAP POL
C5 C45 C82 C112 C141 C174 C200 C239 = CAP_2012
IC1-IC4 IC6 IC9-IC11 IC13 IC15 = OPA855IDSGR_0
IC5 IC12 IC14 IC16 = OPA659IDBVT_8
IC7 = OPA659IDBVT_10
IC8 = MAX3267CSA+
IC17 = THS4509RGTT
JP1-JP8 = 4 HEADER_0
R1 R21 R23 R25 R43 R46 R63 R78 R79 R98 R99 R113 R133 R135 R155 = RESISTOR VAR_0
R2-R10 R26-R34 R47-R56 R64-R72 R80-R88 R100-R108 R114-R122 R136-R144 = R_1608
R11-R14 R16-R20 R22 R24 R35-R38 R40-R42 R44 R45 R57-R62 R73-R77 R89-R97 R109-R112 R123-R132 R134 R145-R154 R156 R157 = R_3216
U1 U13 U24 U35 U46 U57 U67 U78 = LM2940
U2 U14 U25 U36 U47 U58 U68 U79 = R12_150B
U3 U15 U26 U37 U48 U59 U69 U80 = LM2990
U4-U6 U16-U18 U27-U29 U38-U40 U49-U51 U60-U62 U70-U72 U81-U83 = OPA695: Tolerance: ***; User Part Number: ***
U7-U9 U19-U21 U30-U33 U41-U43 U52-U54 U63-U65 U73-U75 U84-U86 = SMA_CON
U10 U22 U34 U44 U55 U66 U76 U87 = mtapd_07_013
U11 U12 U23 U45 U56 U77 U88 = OPA277: Tolerance: ***; User Part Number: ***

## Footprints (pads in the part's own frame, mm; a bottom-side part is the same pattern mirrored in y, then rotated)
HEADER4
  rect 2.41x2.41 hole 1.8: 1(0,5.94)
  round 2.41 hole 1.8: 2(0,1.98) 3(0,-1.98) 4(0,-5.94)
LCC3_SMD
  rect 0.8x1.25 smd: 1(0,0)
  rect 0.8x0.95 smd: 2(-1.35,-2.9) 3(1.35,-2.9)
LM2940_TO220
  round 2.032 hole 1.397: 1(0,0) 2(2.54,0) 3(5.08,0)
  round 4.064 hole 3.81: 4(2.54,14.605)
LM2990_TO220AB
  rect 1.905x1.905 hole 1.372: 1(0,0)
  round 1.905 hole 1.372: 2(2.54,0) 3(5.08,0)
OPA277
  rect 1.27x0.635 smd: 1(-2.477,1.905) 2(-2.477,0.635) 3(-2.477,-0.635) 4(-2.477,-1.905) 5(2.477,-1.905) 6(2.477,-0.635) 7(2.477,0.635) 8(2.477,1.905)
R12_150
  round 1.36 hole 0.75: 2(-7.62,11.43) 3(-7.62,8.89) 8(-7.62,-3.81) 9(-7.62,-6.35) 10(-7.62,-8.89) 12(-7.62,-13.97) 13(7.62,-13.97) 15(7.62,-8.89) 16(7.62,-6.35) 17(7.62,-3.81) 22(7.62,8.89) 23(7.62,11.43)
RFSMAV
  round 1.905 hole 1.372: 1(0,0) 2(-2.54,-2.54) 3(2.54,-2.54) 4(2.54,2.54) 5(-2.54,2.54)
SMC1608
  rect 0.813x0.965 smd: 1(0,0) 2(1.422,0)
SMC2012
  rect 1.27x1.27 smd: 1(0,0) 2(2.134,0)
SMC321612
  rect 1.27x2.007 smd: 1(-1.372,0) 2(1.372,0)
SMC603212
  rect 2.642x2.235 smd: 1(0,0) 2(4.978,0)
SMR1005
  rect 0.7x0.6 smd: 1(-0.55,0) 2(0.55,0)
SMR1608
  rect 0.813x0.965 smd: 1(0,0) 2(1.422,0)
SMR3216
  rect 1.27x2.007 smd: 1(-1.372,0) 2(1.372,0)
SOIC8
  rect 1.27x0.635 smd: 1(-2.477,1.905) 2(-2.477,0.635) 3(-2.477,-0.635) 4(-2.477,-1.905) 5(2.477,-1.905) 6(2.477,-0.635) 7(2.477,0.635) 8(2.477,1.905)
SOIC127P600X175-8N
  rect 1.525x0.65 smd: 1(-2.712,1.905) 2(-2.712,0.635) 3(-2.712,-0.635) 4(-2.712,-1.905) 5(2.712,-1.905) 6(2.712,-0.635) 7(2.712,0.635) 8(2.712,1.905)
SON50P200X200X80-9N
  rect 0.7x0.3 smd: 1(-1.05,0.75) 2(-1.05,0.25) 3(-1.05,-0.25) 4(-1.05,-0.75) 5(1.05,-0.75) 6(1.05,-0.25) 7(1.05,0.25) 8(1.05,0.75)
  rect 1x1.7 smd: 9(0,0)
SOT95P280X145-5N
  rect 1.2x0.6 smd: 1(-1.25,0.95) 2(-1.25,0) 3(-1.25,-0.95) 4(1.25,-0.95) 5(1.25,0.95)
ST5EW
  rect 2x1.4 smd: 1(0,0) 2(0,-5.08) 3(5.397,-2.54)
THS4509RGTT_PIN16_TEST_2_THS4509RGTT
  oval 0.3x0.85 smd rot 89.8: 1(-1.48,0.75) 2(-1.48,0.25) 3(-1.48,-0.25) 4(-1.48,-0.75)
  oval 0.3x0.85 smd: 5(-0.75,-1.48) 6(-0.25,-1.48) 7(0.25,-1.48) 8(0.75,-1.48) 13(0.75,1.42) 14(0.25,1.42) 15(-0.25,1.42) 16(-0.75,1.42)
  oval 0.85x0.3 smd: 9(1.42,-0.75) 10(1.42,-0.25) 11(1.42,0.25) 12(1.42,0.75)
  rect 1.55x1.55 smd: 17(0,0)
unnamed
  round 1.27 hole 6.35 unplated: (0,0)

## Nets
12V_1: C108.1 C109.1 C111.1 JP4.4 U35.1 U36.22 U36.23
12V_2: C196.1 C197.1 C199.1 JP7.4 U67.1 U68.22 U68.23
12V_3: C137.1 C138.1 C140.1 JP5.4 U46.1 U47.22 U47.23
12V_4: C235.1 C236.1 C238.1 JP8.4 U78.1 U79.22 U79.23
12V_5: C170.1 C171.1 C173.1 JP6.4 U57.1 U58.22 U58.23
12V_6: C1.1 C2.1 C4.1 JP1.4 U1.1 U2.22 U2.23
12V_7: C41.1 C42.1 C44.1 JP2.4 U13.1 U14.22 U14.23
12V_8: C78.1 C79.1 C81.1 JP3.4 U24.1 U25.22 U25.23
-12V_1: C113.2 C114.2 JP4.2 U37.2
-12V_2: C201.2 C202.2 JP7.2 U69.2
-12V_3: C142.2 C143.2 JP5.2 U48.2
-12V_4: C240.2 C241.2 JP8.2 U80.2
-12V_5: C175.2 C176.2 JP6.2 U59.2
-12V_6: C6.2 C7.2 JP1.2 U3.2
-12V_7: C46.2 C47.2 JP2.2 U15.2
-12V_8: C83.2 C84.2 JP3.2 U26.2
GND: C1.2 C2.2 C3.2 C4.2 C5.2 C6.1 C7.1 C8.1 C9.1 C10.2 C11.1 C12.2 C13.1 C14.2 C15.1 C16.2 C17.1 C18.2 C19.1 C20.2 C21.1 C22.2 C23.1 C24.2 C25.1 C29.1 C30.1 C31.1 C32.2 C33.2 C35.1 C36.1 C37.1 C38.1 C39.2 C40.1 C41.2 C42.2 C43.2 C44.2 C45.2 C46.1 C47.1 C48.1 C49.1 C50.2 C51.1 C52.2 C53.1 C54.2 C55.1 C56.2 C57.1 C58.2 C59.1 C60.2 C61.1 C62.2 C63.1 C66.1 C67.2 C68.1 C69.2 C70.1 C71.1 C72.2 C74.1 C75.1 C76.1 C77.2 C78.2 C79.2 C80.2 C81.2 C82.2 C83.1 C84.1 C85.1 C86.1 C87.2 C88.1 C89.2 C90.1 C91.2 C92.1 C93.2 C94.1 C95.2 C96.1 C97.2 C98.1 C99.2 C100.1 C101.2 C102.1 C103.2 C104.1 C107.1 C108.2 C109.2 C110.2 C111.2 C112.2 C113.1 C114.1 C115.1 C116.1 C117.2 C118.1 C119.2 C120.1 C121.2 C122.1 C123.2 C124.1 C125.2 C126.1 C127.2 C128.1 C129.1 C130.2 C134.1 C135.1 C136.1 C137.2 C138.2 C139.2 C140.2 C141.2 C142.1 C143.1 C144.1 C145.1 C146.2 C147.1 C148.2 C149.1 C150.2 C151.1 C152.2 C153.1 C154.2 C155.1 C156.2 C157.1 C158.2 C161.1 C162.1 C163.2 C165.2 C167.1 C168.1 C169.1 C170.2 C171.2 C172.2 C173.2 C174.2 C175.1 C176.1 C177.1 C178.1 C179.2 C180.1 C181.2 C182.1 C183.2 C184.1 C185.2 C186.1 C187.2 C188.1 C189.2 C190.1 C191.2 C192.1 C193.2 C194.1 C195.2 C196.2 C197.2 C198.2 C199.2 C200.2 C201.1 C202.1 C203.1 C204.1 C205.2 C206.1 C207.2 C208.1 C209.2 C210.1 C211.2 C212.1 C213.2 C214.1 C215.2 C216.1 C217.1 C218.2 C219.1 C220.2 C224.1 C225.2 C229.1 C230.1 C231.2 C232.1 C233.1 C234.1 C235.2 C236.2 C237.2 C238.2 C239.2 C240.1 C241.1 C242.1 C243.1 C244.2 C245.1 C246.2 C247.1 C248.2 C249.1 C250.2 C251.1 C252.2 C253.1 C254.2 C255.2 C256.2 C257.1 C258.1 C259.2 C260.1 C262.1 C268.1 C269.2 C270.1 C271.1 C272.1 C273.1 IC1.5(VS-) IC1.9 IC2.5(VS-) IC2.9 IC3.5(VS-) IC3.9 IC4.5(VS-) IC4.9 IC5.3 IC6.5(VS-) IC6.9 IC8.5 IC8.8 IC9.5(VS-) IC9.9 IC10.5(VS-) IC10.9 IC11.5(VS-) IC11.9 IC13.5(VS-) IC13.9 IC15.5(VS-) IC15.9 IC17.13 IC17.14 IC17.15 IC17.16(VS-_4) IC17.17 JP1.3 JP2.3 JP3.3 JP4.3 JP5.3 JP6.3 JP7.3 JP8.3 R1.1 R5.2 R6.2 R7.2 R20.1 R25.1 R29.2 R30.2 R31.2 R45.2 R46.1 R50.2 R51.2 R52.2 R61.2 R62.2 R63.1 R67.2 R68.2 R69.2 R75.2 R79.1 R83.2 R84.2 R85.2 R90.2 R95.2 R99.1 R103.2 R104.2 R105.2 R110.2 R112.2 R113.1 R117.2 R118.2 R119.2 R127.2 R129.1 R131.1 R135.1 R139.2 R140.2 R141.2 R149.2 R150.2 R153.1 R157.2 U1.2 U1.4 U2.2 U2.3 U2.10 U2.15 U3.1 U7.2 U7.3 U7.4 U7.5 U8.2 U8.3 U8.4 U8.5 U9.2 U9.3 U9.4 U9.5 U13.2 U13.4 U14.2 U14.3 U14.10 U14.15 U15.1 U19.2 U19.3 U19.4 U19.5 U20.2 U20.3 U20.4 U20.5 U21.2 U21.3 U21.4 U21.5 U24.2 U24.4 U25.2 U25.3 U25.10 U25.15 U26.1 U30.2 U30.3 U30.4 U30.5 U31.2 U31.3 U31.4 U31.5 U32.2 U32.3 U32.4 U32.5 U33.2 U33.3 U33.4 U33.5 U35.2 U35.4 U36.2 U36.3 U36.10 U36.15 U37.1 U41.2 U41.3 U41.4 U41.5 U42.2 U42.3 U42.4 U42.5 U43.2 U43.3 U43.4 U43.5 U46.2 U46.4 U47.2 U47.3 U47.10 U47.15 U48.1 U52.2 U52.3 U52.4 U52.5 U53.2 U53.3 U53.4 U53.5 U54.2 U54.3 U54.4 U54.5 U57.2 U57.4 U58.2 U58.3 U58.10 U58.15 U59.1 U63.2 U63.3 U63.4 U63.5 U64.2 U64.3 U64.4 U64.5 U65.2 U65.3 U65.4 U65.5 U67.2 U67.4 U68.2 U68.3 U68.10 U68.15 U69.1 U73.2 U73.3 U73.4 U73.5 U74.2 U74.3 U74.4 U74.5 U75.2 U75.3 U75.4 U75.5 U78.2 U78.4 U79.2 U79.3 U79.10 U79.15 U80.1 U84.2 U84.3 U84.4 U84.5 U85.2 U85.3 U85.4 U85.5 U86.2 U86.3 U86.4 U86.5
+VS_5V_1: C110.1 C116.2 C117.1 C118.2 C119.1 C120.2 C121.1 C129.2 C130.1 C134.2 IC9.7 R78.2 U35.3(OUT) U38.7 U39.7 U40.7 U45.7
+VS_5V_2: C198.1 C204.2 C205.1 C206.2 C207.1 C208.2 C209.1 C217.2 C218.1 C219.2 C220.1 C224.2 C225.1 C232.2 IC13.7 IC14.5 IC15.7 R133.2 U67.3(OUT) U70.7 U71.7 U72.7 U77.7
+VS_5V_3: C139.1 C145.2 C146.1 C147.2 C148.1 C149.2 C150.1 C157.2 C158.1 C162.2 C163.1 C167.2 IC10.7 IC11.7 R98.1 U46.3(OUT) U49.7 U50.7 U51.7 U56.7
+VS_5V_4: C237.1 C243.2 C244.1 C245.2 C246.1 C247.2 C248.1 C255.1 C256.1 C257.2 C258.2 C259.1 C260.2 C271.2 IC16.5 IC17.5 IC17.6 IC17.7 IC17.8 R155.2 U78.3(OUT) U81.7 U82.7 U83.7 U88.7
+VS_5V_5: C172.1 C178.2 C179.1 C180.2 C181.1 C182.2 C183.1 C190.2 C191.1 IC12.5 U57.3(OUT) U60.7 U61.7 U62.7
+VS_5V_6: C3.1 C9.2 C10.1 C11.2 C12.1 C13.2 C14.1 C21.2 C22.1 C23.2 C24.1 C30.2 C31.2 C38.2 C39.1 IC1.7 IC1.8 IC2.7 IC2.8 IC3.7 IC3.8 R21.2 R23.2 U1.3(OUT) U4.7 U5.7 U6.7 U11.7 U12.7
+VS_5V_7: C43.1 C49.2 C50.1 C51.2 C52.1 C53.2 C54.1 C61.2 C62.1 C69.1 C70.2 C71.2 C76.2 C77.1 IC4.7 IC4.8 IC5.5 IC6.7 IC6.8 R43.2 U13.3(OUT) U16.7 U17.7 U18.7 U23.7
+VS_5V_8: C80.1 C86.2 C87.1 C88.2 C89.1 C90.2 C91.1 C98.2 C99.1 C102.2 C103.1 IC7.5 IC8.1(VCC) U24.3(OUT) U27.7 U28.7 U29.7
-VS_5V_1: C115.2 C122.2 C123.1 C124.2 C125.1 C126.2 C127.1 C136.2 R78.1 U37.3(OUT) U38.4 U39.4 U40.4 U45.4
-VS_5V_2: C203.2 C210.2 C211.1 C212.2 C213.1 C214.2 C215.1 C230.2 C231.1 C234.2 IC14.2 R133.1 U69.3(OUT) U70.4 U71.4 U72.4 U77.4
-VS_5V_3: C144.2 C151.2 C152.1 C153.2 C154.1 C155.2 C156.1 C169.2 R98.2 U48.3(OUT) U49.4 U50.4 U51.4 U56.4
-VS_5V_4: C242.2 C249.2 C250.1 C251.2 C252.1 C253.2 C254.1 C268.2 C269.1 C273.2 IC16.2 R155.1 U80.3(OUT) U81.4 U82.4 U83.4 U88.4
-VS_5V_5: C177.2 C184.2 C185.1 C186.2 C187.1 C188.2 C189.1 C194.2 C195.1 IC12.2 U59.3(OUT) U60.4 U61.4 U62.4
-VS_5V_6: C8.2 C15.2 C16.1 C17.2 C18.1 C19.2 C20.1 C37.2 C40.2 R21.1 R23.1 U3.3(OUT) U4.4 U5.4 U6.4 U11.4 U12.4
-VS_5V_7: C48.2 C55.2 C56.1 C57.2 C58.1 C59.2 C60.1 C67.1 C68.2 C75.2 IC5.2 R43.1 U15.3(OUT) U16.4 U17.4 U18.4 U23.4
-VS_5V_8: C85.2 C92.2 C93.1 C94.2 C95.1 C96.2 C97.1 C100.2 C101.1 IC7.2 U26.3(OUT) U27.4 U28.4 U29.4
TIA_OUT_1: C133.2 R75.1 U38.3
TIA_OUT_2: IC14.1(OUTPUT) R126.2 R127.1 U70.3
TIA_OUT_3: R91.2 R93.1 U49.3
TIA_OUT_4: IC16.1(OUTPUT) R147.2 R149.1 U81.3
TIA_OUT_5: IC12.1(OUTPUT) R109.1 R157.1 U60.3
TIA_OUT_6: IC2.6 U4.3
TIA_OUT_7: IC5.1(OUTPUT) R35.2 U16.3
TIA_OUT_8: IC7.1(OUTPUT) R56.1 R57.1 U27.3
VPD_BIAS_1: C112.1 C128.2 R73.1 U36.12 U36.13
VPD_BIAS_2: C200.1 C216.2 R123.1 U68.12 U68.13
VPD_BIAS_3: C141.1 C161.2 R92.1 U47.12 U47.13
VPD_BIAS_4: C239.1 C262.2 R148.1 U79.12 U79.13
VPD_BIAS_5: C174.1 C192.2 R111.1 U58.12 U58.13
VPD_BIAS_6: C5.1 C29.2 R13.1 U2.12 U2.13
VPD_BIAS_7: C45.1 C66.2 R37.1 U14.12 U14.13
VPD_BIAS_8: C82.1 C107.2 R59.1 U25.12 U25.13
N726539: R63.3(WIPER) U36.8 U36.17
N726581: R63.2 U36.9 U36.16(VREF1)
N730815: R70.2 U41.1(SIG)
N730819: R64.1 R70.1 U38.6(OUT) U39.3
N731167: R64.2 R67.1 U38.2
N742690: R65.2 R68.1 U39.2
N742698: R65.1 R71.1 U39.6(OUT) U40.3
N742854: R71.2 U42.1(SIG)
N743534: R66.2 R69.1 U40.2
N743542: R66.1 R72.1 U40.6(OUT)
N743698: R72.2 U43.1(SIG)
N745050: C132.1 R73.2 U44.2
N745537: C131.1 IC9.3 R74.1 U44.3
N745600: C131.2 IC9.1 R74.2
N756483: C132.2 IC9.4 R76.2
N756581: R76.1 R77.1 U45.6
N758041: R77.2 U45.2
N758422: C135.2 R78.3(WIPER) U45.3
N758794: C133.1 IC9.6
N767006: R113.3(WIPER) U68.8 U68.17
N767020: R113.2 U68.9 U68.16(VREF1)
N767070: R120.2 U73.1(SIG)
N767072: R114.1 R120.1 U70.6(OUT) U71.3
N767094: R114.2 R117.1 U70.2
N767126: R115.2 R118.1 U71.2
N767130: R115.1 R121.1 U71.6(OUT) U72.3
N767146: R121.2 U74.1(SIG)
N767168: R116.2 R119.1 U72.2
N767172: R116.1 R122.1 U72.6(OUT)
N767186: R122.2 U75.1(SIG)
N771932: C221.1 C222.2 IC13.3 R124.1
N771940: C221.2 IC13.1 R124.2
N772002: C222.1 R123.2 U76.2
N772124: C223.1 IC13.6
N773258: C226.1 IC15.1 R128.1
N773294: C226.2 C227.2 IC15.3 R128.2
N773445: C229.2 IC13.4 IC15.4 R134.1
N773603: C227.1 R129.2 U76.3
N775876: R132.2 U77.2
N775884: R132.1 R134.2 U77.6
N775986: C233.2 R133.3(WIPER) U77.3
N776837: C228.1 IC15.6
N792404: R46.3(WIPER) U25.8 U25.17
N792418: R46.2 U25.9 U25.16(VREF1)
N792468: R53.2 U30.1(SIG)
N792470: R47.1 R53.1 U27.6(OUT) U28.3
N792492: R47.2 R50.1 U27.2
N792524: R48.2 R51.1 U28.2
N792528: R48.1 R54.1 U28.6(OUT) U29.3
N792544: R54.2 U31.1(SIG)
N792566: R49.2 R52.1 U29.2
N792570: R49.1 R55.1 U29.6(OUT)
N792584: R55.2 U32.1(SIG)
N794420: C104.2 R59.2 U34.2
N794534: C106.2 R60.1
N795928: IC8.3 R62.1 U34.3
N797403: C106.1 IC8.6
N797529: IC7.4 R57.2 R60.2
N798674: C105.1 R58.1
N799083: C105.2 IC8.7
N799799: IC7.3 R58.2 R61.1
N800311: R56.2 U33.1(SIG)
N801268: R25.3(WIPER) U14.8 U14.17
N801282: R25.2 U14.9 U14.16(VREF1)
N801332: R32.2 U19.1(SIG)
N801334: R26.1 R32.1 U16.6(OUT) U17.3
N801356: R26.2 R29.1 U16.2
N801388: R27.2 R30.1 U17.2
N801392: R27.1 R33.1 U17.6(OUT) U18.3
N801408: R33.2 U20.1(SIG)
N801430: R28.2 R31.1 U18.2
N801434: R28.1 R34.1 U18.6(OUT)
N801448: R34.2 U21.1(SIG)
N808788: R79.3(WIPER) U47.8 U47.17
N808802: R79.2 U47.9 U47.16(VREF1)
N808852: R86.2 U52.1(SIG)
N808854: R80.1 R86.1 U49.6(OUT) U50.3
N808876: R80.2 R83.1 U49.2
N808908: R81.2 R84.1 U50.2
N808912: R81.1 R87.1 U50.6(OUT) U51.3
N808928: R87.2 U53.1(SIG)
N808950: R82.2 R85.1 U51.2
N808954: R82.1 R88.1 U51.6(OUT)
N808968: R88.2 U54.1(SIG)
N811585: C159.1 C164.1 IC10.3 IC11.3 R89.1 R94.1 U55.3
N811593: C164.2 IC11.1 R94.2
N811777: C166.1 IC11.6
N811785: C166.2 R93.2 R95.1
N811825: IC10.4 IC11.4 R96.2
N811897: R97.2 U56.2
N811905: R96.1 R97.1 U56.6
N812007: C168.2 R98.3(WIPER) U56.3
N812726: C159.2 IC10.1 R89.2
N812844: C160.1 IC10.6
N812852: C160.2 R90.1 R91.1
N813486: C165.1 R92.2 U55.2
N816117: C193.1 R111.2 U66.2
N816191: IC12.3 R112.1 U66.3
N816627: IC12.4 R109.2 R110.1
N817534: R99.3(WIPER) U58.8 U58.17
N817548: R99.2 U58.9 U58.16(VREF1)
N817598: R106.2 U63.1(SIG)
N817600: R100.1 R106.1 U60.6(OUT) U61.3
N817622: R100.2 R103.1 U60.2
N817654: R101.2 R104.1 U61.2
N817658: R101.1 R107.1 U61.6(OUT) U62.3
N817674: R107.2 U64.1(SIG)
N817696: R102.2 R105.1 U62.2
N817700: R102.1 R108.1 U62.6(OUT)
N817714: R108.2 U65.1(SIG)
N823976: R1.3(WIPER) U2.8 U2.17
N823990: R1.2 U2.9 U2.16(VREF1)
N824040: R8.2 U7.1(SIG)
N824042: R2.1 R8.1 U4.6(OUT) U5.3
N824064: R2.2 R5.1 U4.2
N824096: R3.2 R6.1 U5.2
N824100: R3.1 R9.1 U5.6(OUT) U6.3
N824116: R9.2 U8.1(SIG)
N824138: R4.2 R7.1 U6.2
N824142: R4.1 R10.1 U6.6(OUT)
N824156: R10.2 U9.1(SIG)
N826014: C26.1 IC1.3 R11.1 R17.2 U10.3
N826022: C26.2 IC1.1 R11.2
N826054: R19.1 R24.2 U12.6
N826080: R19.2 U12.2
N826090: C36.2 R23.3(WIPER) U12.3
N826110: C27.1 C28.2 IC2.3 R12.1 R14.2
N826120: C25.2 R13.2 U10.2
N826146: C33.1 IC1.4 R24.1
N826154: C28.1 IC1.6 R14.1 R16.2
N827763: IC3.4 R16.1
N828053: IC3.6 R17.1
N835449: C63.2 R37.2 U22.2
N835457: C64.1 IC4.3 R36.1 R41.2 U22.3
N835465: C64.2 IC4.1 R36.2
N835631: C65.1 IC4.6 R38.1 R40.2
N835651: C65.2 IC5.4 R35.1 R38.2
N835659: C72.1 IC4.4 R44.1
N835855: IC6.4 R40.1
N835875: R42.2 U23.2
N835883: R42.1 R44.2 U23.6
N835997: C74.2 R43.3(WIPER) U23.3
N836862: C27.2 IC2.1 R12.2
N838057: C73.2 IC6.1
N838070: C73.1 IC6.3 R45.1
N838543: C34.1 IC3.3 R20.2
N838571: C34.2 IC3.1
N849193: C223.2 R125.1
N849197: IC14.4 R125.2 R126.1
N849750: IC14.3 R130.1 R131.2
N850088: C228.2 R130.2
N852033: R18.2 U11.2
N852041: R18.1 R22.2 U11.6
N852155: C35.2 R21.3(WIPER) U11.3
N852175: C32.1 IC2.4 R22.1
N856246: IC6.6 R41.1
N865430: R135.2 U79.9 U79.16(VREF1)
N865510: R135.3(WIPER) U79.8 U79.17
N866146: R136.2 R139.1 U81.2
N866154: R136.1 R142.1 U81.6(OUT) U82.3
N866194: R137.2 R140.1 U82.2
N866202: R137.1 R143.1 U82.6(OUT) U83.3
N866242: R138.2 R141.1 U83.2
N866250: R138.1 R144.1 U83.6(OUT)
N866650: R142.2 U84.1(SIG)
N866654: R143.2 U85.1(SIG)
N866658: R144.2 U86.1(SIG)
N868199: C261.1 C264.2 IC17.11 R145.1
N868207: C261.2 C263.1 IC17.10 R145.2
N868323: C265.1 R148.2 U87.2
N868405: C265.2 C267.1 IC17.2 R151.1
N868453: C266.1 C267.2 IC17.3 R151.2
N868461: C264.1 R150.1 U87.3
N878497: C263.2 R146.1
N878505: IC16.4 R147.1 R152.1
N879009: C266.2 R152.2
N879226: C270.2 IC17.4 IC17.9 R156.1
N889164: R154.2 U88.2
N889172: R154.1 R156.2 U88.6
N889286: C272.2 R155.3(WIPER) U88.3
N987907: IC16.3 R146.2 R153.2

Pads without a net: IC1 2; IC2 2; IC3 2; IC4 2; IC6 2; IC8 2 4; IC9 2 8; IC10 2 8; IC11 2 8; IC13 2 8; IC15 2 8; IC17 1 12; JP1 1; JP2 1; JP3 1; JP4 1; JP5 1; JP6 1; JP7 1; JP8 1; U4 1 5 8; U5 1 5 8; U6 1 5 8; U10 1; U11 1 5 8; U12 1 5 8; U16 1 5 8; U17 1 5 8; U18 1 5 8; U22 1; U23 1 5 8; U27 1 5 8; U28 1 5 8; U29 1 5 8; U34 1; U38 1 5 8; U39 1 5 8; U40 1 5 8; U44 1; U45 1 5 8; U49 1 5 8; U50 1 5 8; U51 1 5 8; U55 1; U56 1 5 8; U60 1 5 8; U61 1 5 8; U62 1 5 8; U66 1; U70 1 5 8; U71 1 5 8; U72 1 5 8; U76 1; U77 1 5 8; U81 1 5 8; U82 1 5 8; U83 1 5 8; U87 1; U88 1 5 8

## Via types
v1: diameter 0.61, hole 0.33, TOP to BOTTOM, 1966 vias

## Routing (per net, layer and track width the routed paths; a pad name or vN(x,y) marks a point on that pad's centre or on a via; arc(x,y) is an arc through that point)
12V_1: length 54
  TOP w1: U36.22 U36.23 ; U36.23 331.01,142.92 331.02,142.93 C111.1 ; U36.23 320.8,139.07 JP4.4 314.5,142.64 C108.1 314.49,140.5 C109.1 314.52,139.36 314.53,139.35 U35.1
  BOTTOM w0.334: U36.23 331.01,139.93 ; U36.23 330.16,139.07 ; U36.23 331.87,139.07 ; U36.23 331.01,138.22 ; 333.56,138.22 U36.22 ; U36.22 332.7,139.07 ; U36.22 333.56,139.93 ; U36.22 334.41,139.07 ; U35.1 315.72,136.56 ; U35.1 314.53,137.75 ; U35.1 313.34,136.56 ; 314.5,143.99 JP4.4 ; JP4.4 315.88,145.37 ; JP4.4 314.5,146.75 ; JP4.4 313.12,145.37
12V_2: length 52.5
  TOP w1: U68.23 241.01,142.92 240.98,142.96 C199.1 ; U68.23 228.25,141.62 JP7.4 224.5,142.39 C196.1 224.5,139.91 C197.1 224.48,137.3 224.47,137.29 U67.1 ; U68.23 U68.22
  BOTTOM w0.334: 224.47,134.46 U67.1 ; U67.1 224.47,136.84 ; U67.1 225.66,135.65 ; U67.1 223.28,135.65 ; U68.22 244.41,141.62 ; U68.22 243.56,140.76 ; U68.22 242.7,141.62 ; U68.22 243.56,142.47 ; JP7.4 224.5,146.75 ; JP7.4 223.12,145.37 ; JP7.4 225.88,145.37 ; JP7.4 224.5,143.99 ; U68.23 241.87,141.62 ; U68.23 240.16,141.62 ; U68.23 241.01,142.47 ; U68.23 241.01,140.76
12V_3: length 52.1
  TOP w1: U46.1 C138.1 134.5,142.32 C137.1 134.5,145.37 ; 134.5,145.37 JP5.4 ; 134.5,145.37 138.29,141.58 149.67,141.58 149.71,141.62 U47.23 ; C140.1 151.04,142.95 151.01,142.92 U47.23 ; U47.23 U47.22
  BOTTOM w0.334: U46.1 134.5,137.24 ; U46.1 135.69,136.05 ; U46.1 133.31,136.05 ; U46.1 134.5,134.86 ; 153.56,140.76 U47.22 ; U47.22 152.7,141.62 ; U47.22 154.41,141.62 ; U47.22 153.56,142.47 ; 151.01,140.76 U47.23 ; U47.23 151.87,141.62 ; U47.23 151.01,142.47 ; U47.23 150.16,141.62 ; JP5.4 135.88,145.37 ; JP5.4 133.12,145.37 ; JP5.4 134.5,143.99 ; JP5.4 134.5,146.75
12V_4: length 53
  TOP w1: 61.02,60.61 49.26,60.61 JP8.4 44.5,62.47 C235.1 44.49,62.43 C236.1 44.49,57.7 44.5,57.69 U78.1 ; 61.02,60.61 61.02,61.92 61.08,61.99 C238.1 ; 61.02,60.61 63.56,60.61
  BOTTOM w0.334: 61.02,60.61 61.02,61.47 ; 61.02,60.61 61.87,60.61 ; 61.02,60.61 60.16,60.61 ; 61.02,60.61 61.02,59.76 ; JP8.4 45.88,65.37 ; JP8.4 43.12,65.37 ; JP8.4 44.5,63.99 ; JP8.4 44.5,66.75 ; 44.5,54.86 U78.1 ; U78.1 45.69,56.05 ; U78.1 43.31,56.05 ; U78.1 44.5,57.24 ; 62.7,60.61 63.56,60.61 ; 63.56,60.61 64.41,60.61 ; 63.56,60.61 63.56,59.76 ; 63.56,60.61 63.56,61.47
12V_5: length 49.7
  TOP w1: U58.23 49.17,141.1 JP6.4 44.88,142.3 C170.1 44.81,142.23 44.81,140.13 C171.1 44.81,139.02 44.82,139.01 U57.1 ; U58.23 U58.22 ; U58.23 59.55,142.41 59.55,142.41 59.55,143.43 59.54,143.44 C173.1
  BOTTOM w0.334: 61.23,141.1 U58.22 ; U58.22 62.94,141.1 ; U58.22 62.08,141.96 ; U58.22 62.08,140.24 ; U58.23 60.4,141.1 ; U58.23 59.55,140.24 ; U58.23 58.69,141.1 ; U58.23 59.55,141.96 ; U57.1 44.82,137.36 ; U57.1 46.01,136.17 ; U57.1 43.63,136.17 ; U57.1 44.82,134.98 ; 44.88,144.01 JP6.4 ; JP6.4 43.5,145.39 ; JP6.4 46.26,145.39 ; JP6.4 44.88,146.77
12V_6: length 43.8
  TOP w0.334: U2.22 152.53,72.4 ; U2.22 151.67,71.54 ; U2.22 152.53,70.68 ; U2.23 153.39,74.08 ; U2.23 151.67,74.08 ; U2.23 152.53,74.94 ; U2.23 152.53,73.22 ; U1.1 141.94,57.16 ; U1.1 143.13,55.97 ; U1.1 140.74,55.97 ; JP1.4 143.32,64.89 ; JP1.4 141.94,66.27 ; JP1.4 141.94,63.51
  TOP w1: U2.22 C4.1
  BOTTOM w1: U1.1 141.94,57.61 141.9,57.65 C2.1 141.9,60.27 141.9,60.27 C1.1 141.94,62.22 JP1.4 145.88,64.89 U2.22 U2.23
12V_7: length 43.9
  TOP w0.334: 242.16,73.88 242.16,74.74 ; 242.16,73.88 242.16,73.02 ; 242.16,73.88 243.01,73.88 ; 242.16,73.88 241.3,73.88 ; JP2.4 231.08,66.5 ; JP2.4 231.08,63.74 ; JP2.4 232.46,65.12 ; U13.1 232.28,56.59 ; U13.1 231.09,57.78 ; U13.1 229.9,56.59 ; 242.16,71.34 242.16,72.2 ; 242.16,71.34 241.3,71.34 ; 242.16,71.34 242.16,70.48
  TOP w1: 242.16,71.34 C44.1
  BOTTOM w1: 242.16,73.88 242.16,71.34 235.94,65.12 JP2.4 231.08,62.46 C41.1 231.03,60.45 C42.1 231.09,58.52 231.09,58.52 U13.1
12V_8: length 30.5
  TOP w0.334: U24.1 315.7,53.65 ; U24.1 314.51,54.84 ; U24.1 313.31,53.65 ; 312.89,63.88 JP3.4 ; JP3.4 315.65,63.88 ; JP3.4 314.27,65.26 ; JP3.4 314.27,62.5 ; 329.81,61.44 U25.22 ; U25.22 330.67,62.29 ; U25.22 331.52,61.44 ; U25.22 330.67,60.58 ; U25.23 328.98,61.44 ; U25.23 328.13,60.58 ; U25.23 327.27,61.44
  TOP w1: U25.23 328.13,62.74 328.07,62.8 328.07,64.39 328.12,64.44 C81.1
  BOTTOM w1: U24.1 314.51,56.41 314.16,56.76 C79.1 314.16,60.31 C78.1 314.26,63.87 JP3.4
-12V_1: length 24
  TOP w1: JP4.2 308.49,153.29 308.45,153.26 C113.2 304.97,153.26 304.96,153.26 C114.2 302.58,153.26 302.56,153.28 U37.2
  BOTTOM w0.334: 314.5,151.91 JP4.2 ; JP4.2 313.12,153.29 ; JP4.2 315.88,153.29 ; JP4.2 314.5,154.67 ; U37.2 300.6,153.28 ; U37.2 299.47,152.15 ; U37.2 298.34,153.28
-12V_2: length 24.1
  TOP w1: JP7.2 222.67,153.29 222.66,153.3 C201.2 214.92,153.3 214.9,153.29 C202.2 212.47,153.29 212.47,153.29 U69.2
  BOTTOM w0.334: 223.12,153.29 JP7.2 ; JP7.2 225.88,153.29 ; JP7.2 224.5,154.67 ; JP7.2 224.5,151.91 ; 209.29,152.16 U69.2 ; U69.2 208.16,153.29 ; U69.2 210.42,153.29
-12V_3: length 23.9
  TOP w1: JP5.2 128.58,153.29 128.57,153.3 C142.2 125.02,153.3 125,153.31 C143.2 122.6,153.31 122.53,153.38 U48.2
  BOTTOM w0.334: JP5.2 135.88,153.29 ; JP5.2 134.5,151.91 ; JP5.2 133.12,153.29 ; JP5.2 134.5,154.67 ; 119.53,152.25 U48.2 ; U48.2 118.4,153.38 ; U48.2 120.66,153.38
-12V_4: length 23.9
  TOP w1: JP8.2 42.67,73.29 42.66,73.28 C240.2 34.95,73.28 34.92,73.3 C241.2 32.56,73.3 32.56,73.3 U80.2
  BOTTOM w0.334: 43.12,73.29 JP8.2 ; JP8.2 44.5,71.91 ; JP8.2 44.5,74.67 ; JP8.2 45.88,73.29 ; U80.2 30.65,73.3 ; U80.2 28.39,73.3 ; U80.2 29.52,72.17
-12V_5: length 26.6
  TOP w1: U59.2 28.12,153.03 28.13,153.04 C176.2 33.94,153.04 34,153.1 C175.2 38.01,153.1 38.23,153.31 JP6.2
  BOTTOM w0.334: 27.34,153.03 U59.2 26.21,154.16 ; JP6.2 46.26,153.31 ; JP6.2 43.5,153.31 ; JP6.2 44.88,151.93 ; JP6.2 44.88,154.69
